# Altium PCB Mach_In.PcbDoc
Units mm, origin at the board's own origin, x right, y up, seen from the top; angles counter-clockwise.
Board outline 250 x 150 mm, 2 copper layers (Top Layer, Bottom Layer); 89 components, 76 nets, 360 pads, 0 vias.
Unrouted connection lines stored in the file: 224.
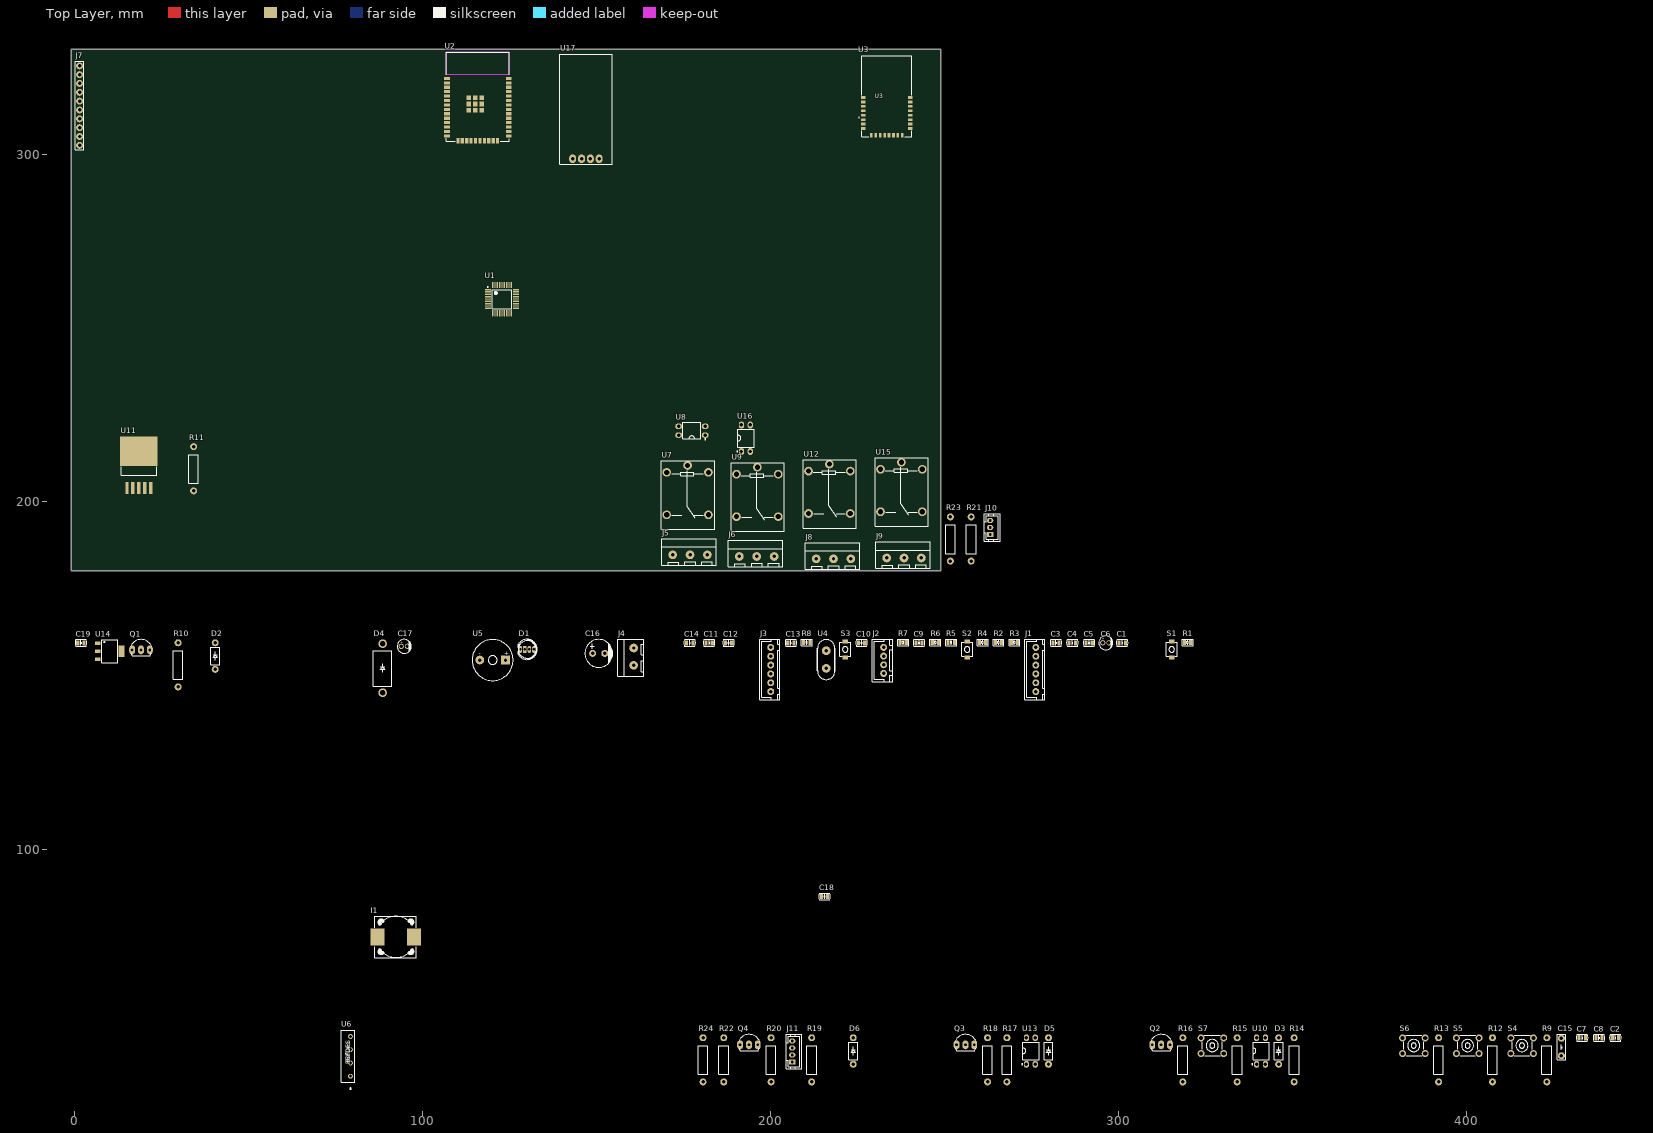
[diagram p0: Top Layer view]
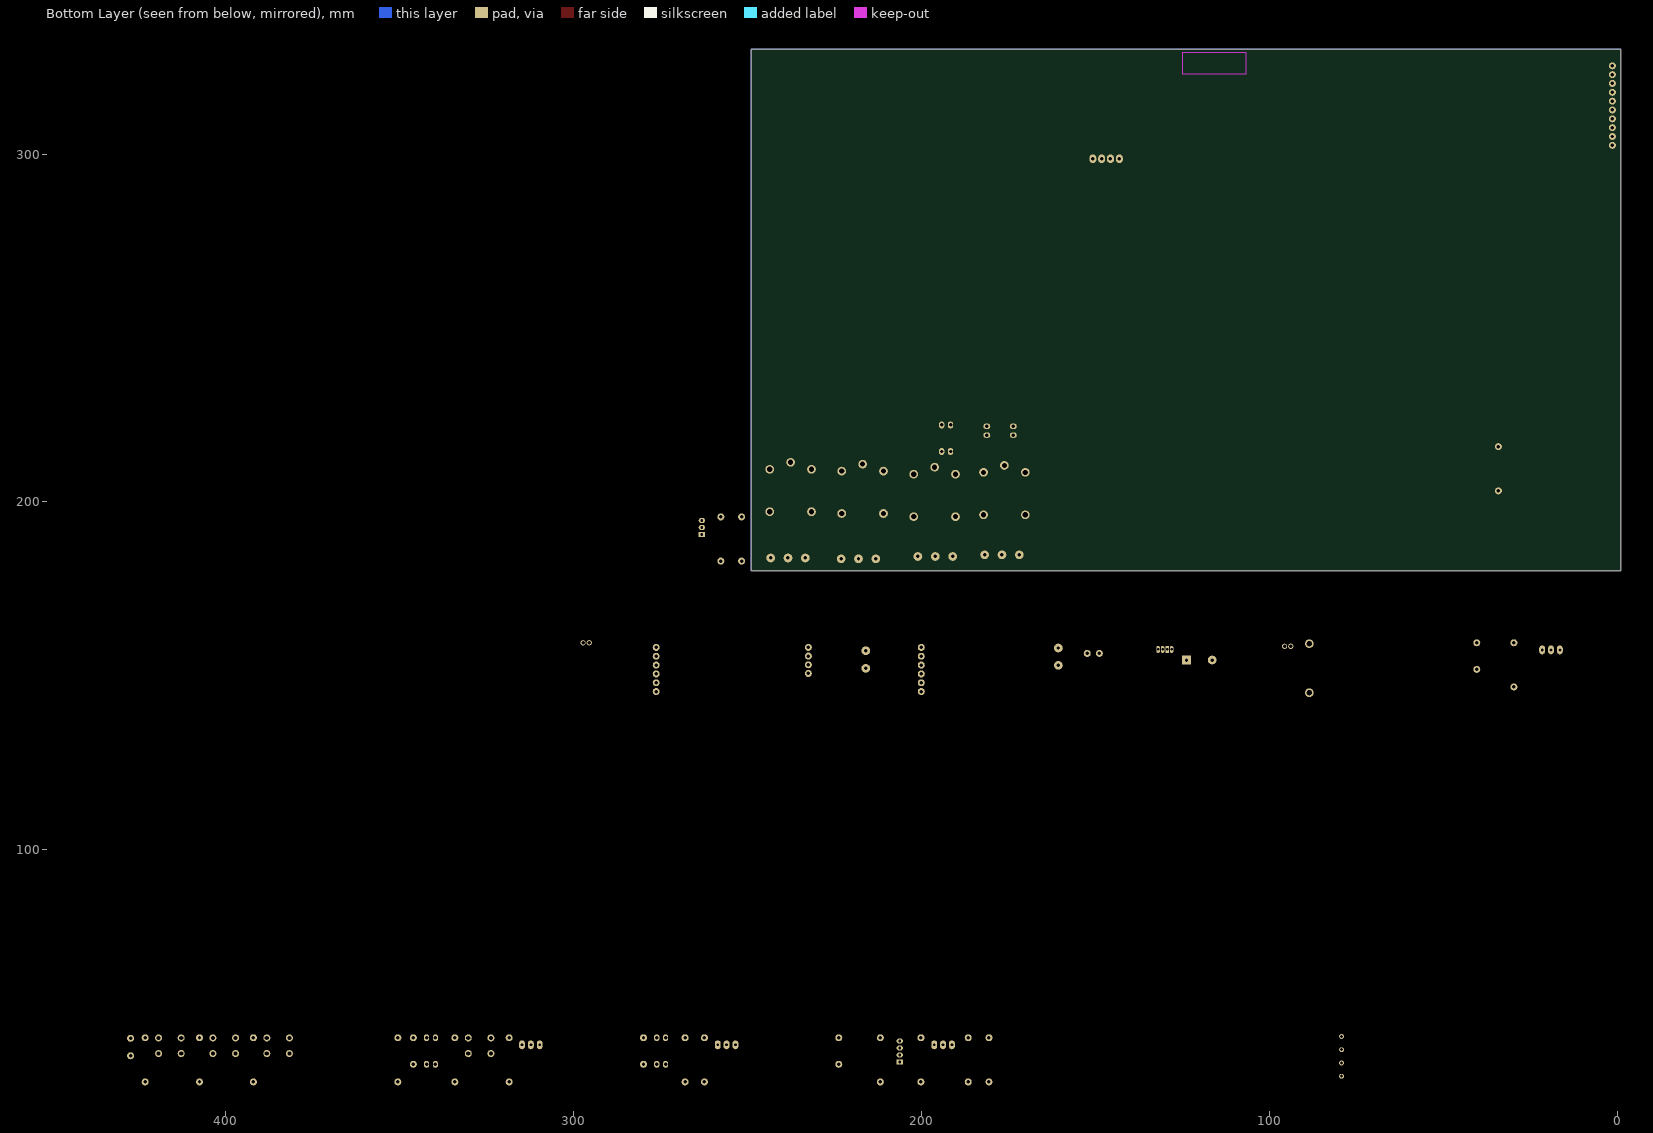
[diagram p1: Bottom Layer view, seen from below]

## Layer stack, top to bottom
Top Solder: solder mask 0.0102, Solder Resist, Dk 3.5
Top Layer: signal copper 0.0356
Dielectric 1: dielectric 0.32, FR-4, Dk 4.8
Bottom Layer: signal copper 0.0356
Bottom Solder: solder mask 0.0102, Solder Resist, Dk 3.5

## Board outline
-1.08,180.2 -1.08,330.2 248.92,330.2 248.92,180.2

## Design rules (kind name [scope] priority, off if disabled: settings)
Clearance [All] p1: gap=0.254 ignorepadtopadclearanceinfootprint=FALSE
PolygonConnect [All] p1: connectstyle=Relief reliefconductorwidth=0.254 reliefentries=4 polygonreliefangle="90 Angle" airgapwidth=0.254
RoutingVias [All] p1: holewidth=0.711 width=1.27 viastyle="Through Hole" minholewidth=0.711 minwidth=1.27 maxholewidth=0.711 maxwidth=1.27
SolderMaskExpansion [All] p1: expansion=0.102 istentingtop=FALSE
SupplyNets "Schematic Supply Nets_3" [InNet('+12')] p1: voltage=0.000
SupplyNets "Schematic Supply Nets_2" [InNet('+3.3')] p2: voltage=0.000
SupplyNets "Schematic Supply Nets_1" [InNet('+5')] p3: voltage=0.000
SupplyNets "Schematic Supply Nets" [InNet('GND')] p4: voltage=0.000
Width [All] p1: maxlimit=0.254 minlimit=0.254 preferedwidth=0.254
30 further rules are at their usual default settings.

## Components (designator, comment, footprint, x,y, rotation, side; value= is the part's Value field where it differs from the comment)
C1 "100nF" "CAPACITOR 0805" 301.104,159.512 r0 top
C2 "100nF" "CAPACITOR 0805" 442.849,45.974 r0 top
C3 "100nF" "CAPACITOR 0805" 282.054,159.512 r0 top
C4 "100nF" "CAPACITOR 0805" 286.753,159.512 r0 top
C5 "100nF" "CAPACITOR 0805" 291.579,159.512 r0 top
C6 "10uF" 0.47uF/50V 296.405,159.512 r0 top
C7 "100nF" "CAPACITOR 0805" 433.324,45.974 r0 top
C8 "10uF" "CAPACITOR 0805" 438.15,45.974 r0 top
C9 "100nF" "CAPACITOR 0805" 242.684,159.512 r0 top
C10 "CAPACITOR 0805" "CAPACITOR 0805" 226.174,159.512 r0 top
C11 "100nF" "CAPACITOR 0805" 182.359,159.512 r0 top
C12 "10uF" "CAPACITOR 0805" 187.947,159.512 r0 top
C13 "CAPACITOR 0805" "CAPACITOR 0805" 205.854,159.512 r0 top
C14 "CAPACITOR 0805" "CAPACITOR 0805" 176.771,159.512 r0 top
C15 "103" "CAPACITOR 103" 427.355,43.307 r0 top
C16 "100uF" 100uF/50V 150.609,156.464 r0 top
C17 "47uF" 0.22uF/50V 94.729,158.496 r0 top
C18 "100nF" "CAPACITOR 0805" 215.53,86.614 r0 top
C19 "100uF" "CAPACITOR 0805" 1.765,159.512 r0 top
D1 "LED_RGB" LED_RGB_5mm 130.035,157.607 r0 top
D2 "1N4007" 1N4007 40.373,155.702 r0 top
D3 "1N4007" 1N4007 346.075,42.164 r0 top
D4 "1N5822" DO201AD 88.506,152.146 r0 top
D5 "1N4007" 1N4007 279.908,42.164 r0 top
D6 "1N4007" 1N4007 223.774,42.164 r0 top
I1 "1260" 1260 92.245,74.93 r0 top
J1 "CC DEBUGGER" JST-2.54-6P 275.958,151.892 r0 top
J2 "ST LINK" JST-2.54-4P 232.143,154.432 r0 top
J3 "USB TTL" JST-2.54-6P 199.758,151.892 r0 top
J4 "12AC" BORNE-5.00-2P 159.88,155.194 r0 top
J5 "BORNE-5.00-3P" BORNE-5.00-3P 176.546,185.6 r270 top
J6 "BORNE-5.00-3P" BORNE-5.00-3P 195.707,185.145 r270 top
J7 "TFT 2.8 inh" MALE-2.54-10P 1.377,313.944 r0 top
J8 "BORNE-5.00-3P" BORNE-5.00-3P 217.789,184.457 r270 top
J9 "BORNE-5.00-3P" BORNE-5.00-3P 238.061,184.711 r270 top
J10 "ACS712" JST-2.00-3P 263.652,192.659 r90 top
J11 "MQ_2" JST-2.00-4P 206.756,42.037 r90 top
Q1 "C9014" QTO-92 19.037,157.48 r0 top
Q2 "C9014" QTO-92 312.293,43.942 r0 top
Q3 "C9014" QTO-92 256.032,43.942 r0 top
Q4 "C9014" QTO-92 193.802,43.942 r0 top
R1 "RESISTOR_0805" RESISTOR_0805 319.9,159.639 r0 top
R2 "RESISTOR_0805" RESISTOR_0805 265.544,159.639 r0 top
R3 "RESISTOR_0805" RESISTOR_0805 270.116,159.639 r0 top
R4 "RESISTOR_0805" RESISTOR_0805 260.972,159.639 r0 top
R5 "RESISTOR_0805" RESISTOR_0805 251.955,159.639 r0 top
R6 "RESISTOR_0805" RESISTOR_0805 247.383,159.639 r0 top
R7 "RESISTOR_0805" RESISTOR_0805 238.112,159.639 r0 top
R8 "RESISTOR_0805" RESISTOR_0805 210.426,159.639 r0 top
R9 "1K" RESSITOR_PTH_12.5mm 423.164,39.624 r90 top
R10 "1K" RESSITOR_PTH_12.5mm 29.705,153.162 r90 top
R11 "1K" RESSITOR_PTH_12.5mm 34.163,209.55 r90 top
R12 "1K" RESSITOR_PTH_12.5mm 407.543,39.624 r90 top
R13 "1K" RESSITOR_PTH_12.5mm 392.049,39.624 r90 top
R14 "1K" RESSITOR_PTH_12.5mm 350.52,39.624 r90 top
R15 "1K" RESSITOR_PTH_12.5mm 334.137,39.624 r90 top
R16 "1K" RESSITOR_PTH_12.5mm 318.516,39.624 r90 top
R17 "1K" RESSITOR_PTH_12.5mm 267.97,39.624 r90 top
R18 "1K" RESSITOR_PTH_12.5mm 262.382,39.624 r90 top
R19 "1K" RESSITOR_PTH_12.5mm 211.836,39.624 r90 top
R20 "1K" RESSITOR_PTH_12.5mm 200.152,39.624 r90 top
R21 "1K" RESSITOR_PTH_12.5mm 257.683,189.357 r90 top
R22 "1K" RESSITOR_PTH_12.5mm 186.563,39.624 r90 top
R23 "2K" RESSITOR_PTH_12.5mm 251.714,189.357 r90 top
R24 "2K" RESSITOR_PTH_12.5mm 180.594,39.624 r90 top
S1 "PUSH_BUTTON_SMD_3X4X2" PUSH_BUTTON_SMD_3X4X2 315.328,157.607 r90 top
S2 "PUSH_BUTTON_SMD_3X4X2" PUSH_BUTTON_SMD_3X4X2 256.527,157.607 r90 top
S3 "PUSH_BUTTON_SMD_3X4X2" PUSH_BUTTON_SMD_3X4X2 221.475,157.607 r90 top
S4 "PUSH_BUTTON_6X6" PUSH_BUTTON_6X6 416.052,43.688 r0 top
S5 "PUSH_BUTTON_6X6" PUSH_BUTTON_6X6 400.431,43.688 r0 top
S6 "PUSH_BUTTON_6X6" PUSH_BUTTON_6X6 384.937,43.688 r0 top
S7 "PUSH_BUTTON_6X6" PUSH_BUTTON_6X6 327.025,43.688 r0 top
U1 "STM32F103C8T6" STM-LQFP48_N 122.809,258.318 r0 top
U2 "ESP32-WROOM-32D" ESP32-WROOM-32D 115.841,312.804 r0 top
U3 "E18-MS1-PCB" E18-MS1-PCB_BYT 233.426,316.611 r0 top
U4 "CRISTAL_8Mhz" CRISTAL_16Mhz 216.014,154.686 r90 top
U5 "BUZZER" BUZZER_12mm 120.129,154.559 r0 top
U6 "KBP210G" TO_P2005G_DIO 79.248,34.925 r90 top
U7 "RELE" RELE 176.276,201.93 r270 top
U8 "PC817" PC817_DIP 177.419,220.472 r90 top
U9 "RELE" RELE 196.342,201.422 r270 top
U10 "PC817" PC817_DIP 340.995,42.164 r0 top
U11 "LM2596" LM2596 18.415,210.312 r270 top
U12 "RELE" RELE 217.043,202.311 r270 top
U13 "PC817" PC817_DIP 274.828,42.164 r0 top
U14 "AMS1117" AMS1117 10.02,157.099 r0 top
U15 "RELE" RELE 237.744,202.819 r270 top
U16 "PC817" PC817_DIP 192.913,218.313 r0 top
U17 "DHT22" DHT22_90 146.939,312.928 r270 top

## Footprints (in the part's own frame and the unit in brackets; to place one, negate y for a bottom-side part, rotate by r counter-clockwise, add the part's x,y. Pads: shape width x height; smd on the part's side, far side on the other; paste and mask are expansions set on the pad)
0.22uF/50V [mm] "ELECTROLYTIC CAPACITOR 4mm"
  round 1.5 hole 1: 1(0.889,0) 2(-0.889,0)
  silkscreen extent -2.01,-2 2.03,2, body extent -1.99,-1.99 2.01,1.99, height 7.01
0.47uF/50V [mm] "ELECTROLYTIC CAPACITOR 4mm"
  round 1.5 hole 1: 1(0.889,0) 2(-0.889,0)
  silkscreen extent -2.01,-2 2.03,2, body extent -1.99,-1.99 2.01,1.99, height 7.01
1N4007 [mm] "Rectifier Diode 1000V 1A DO-41"
  round 2 hole 1: 1(0,-3.81) 2(0,3.81)
  silkscreen extent -1.27,-2.54 1.27,2.54, body extent -1.35,-4.24 1.35,4.24, height 3.35
100uF/50V [mm] "ELECTROLYTIC CAPACITOR 8mm"
  round 2 hole 1 paste-2539.97 mask+0.1: 1(1.745,0) 2(-1.745,0)
  silkscreen extent -3.97,-4 4.03,4, body extent -3.97,-4 4.03,4, height 12
1260 [mm]
  rect 4x5 smd: 1(-5.25,0) 2(5.25,0)
  silkscreen extent -6.04,-6 5.96,6, body extent -6.07,-6.02 5.93,5.98, height 7.46
AMS1117 [mm] "SOT-223"
  rect 1.65x1 smd: 1(-3.4,2.29) 2(-3.4,0) 3(-3.4,-2.29)
  rect 1.65x3.3 smd: 2(3.4,0)
  silkscreen extent -2.3,-3.35 2.3,3.35, body extent -3.6,-3.25 3.4,3.25, height 1.87
BORNE-5.00-2P [mm]
  round 2.5 hole 1: 1(0.754,2.82) 2(0.754,-2.18)
  silkscreen extent -3.75,-5.27 3.75,5.27, body extent -3.86,-5.28 3.74,5.32, height 10.1
BORNE-5.00-3P [mm]
  round 2.5 hole 1: 1(0.815,5.318) 2(0.815,0.318) 3(0.815,-4.683)
  silkscreen extent -3.8,-7.81 3.8,7.81, body extent -3.8,-7.79 3.8,7.81, height 10.1
BUZZER_12mm [mm] "BUZZER MAGNETIC 12MM"
  rect 2.5x2.5 hole 1: 1(3.688,0)
  round 2.5 hole 1: 2(-3.688,0)
  silkscreen extent -5.9,-5.9 5.89,5.88, body extent -6,-5.98 5.99,6.02, height 9.51
"CAPACITOR 103" [mm]
  round 2 hole 1: 1(0,-2.516) 2(0,2.516)
  silkscreen extent -1.27,-3.71 1.27,3.71, body extent -1.2,-2.93 1.25,2.72, height 5.3
"CAPACITOR 0805" [mm]
  rect 0.9x1.45 smd: 1(-0.9,0) 2(0.9,0)
  silkscreen extent -1.68,-0.95 1.67,0.95, body extent -1.03,-0.62 0.97,0.63, height 0.61
CRISTAL_16Mhz [mm] "CRYSTAL 16MHZ PTH"
  round 2.5 hole 1: 1(-2.54,0) 2(2.54,0)
  silkscreen extent -5.75,-2.56 5.75,2.56, body extent -5.56,-2.24 5.44,2.26, height 3.55
DHT22_90 [mm]
  oval 2.5x2 hole 1: 1(14.287,-3.81) 2(14.287,-1.27) 3(14.287,1.27) 4(14.287,3.81)
  silkscreen extent -15.81,-7.49 15.81,7.49, body extent -15.81,-7.55 14.54,7.55, height 7.73
DO201AD [mm] "DO201AD"
  round 2.5 hole 1.4 slot 1.405 at 90 deg: 1(0,-6.985) 2(0,7.112)
  silkscreen extent -2.67,-5.06 2.67,5.1, body extent -2.64,-7.73 2.64,7.73, height 5.65
E18-MS1-PCB_BYT [mil]
  rect 51x30 smd paste+0 mask+0: 1(-264,-13.78) 2(-264,-63.78) 3(-264,-113.78) 4(-264,-163.78) 5(-264,-213.78) 6(-264,-263.78) 7(-264,-313.78) 8(-264,-363.78) 17(264,-363.78) 18(264,-313.78) 19(264,-263.78) 20(264,-213.78) 21(264,-163.78) 22(264,-113.78) 23(264,-63.78) 24(264,-13.78)
  rect 30x51 smd paste+0 mask+0: 9(-175,-439.5) 10(-125,-439.5) 11(-75,-439.5) 12(-25,-439.5) 13(25,-439.5) 14(75,-439.5) 15(125,-439.5) 16(175,-439.5)
  silkscreen extent -282,-458 282,458, body extent -280,-455 280,453, height 94
ESP32-WROOM-32D [mm] "Chip SMD 39 Pads 18x25.5mm w/ Antenna."
  rect 1.65x0.9 smd: 1(-8.875,8.943) 2(-8.875,7.673) 3(-8.875,6.403) 4(-8.875,5.133) 5(-8.875,3.863) 6(-8.875,2.593) 7(-8.875,1.323) 8(-8.875,0.053) 9(-8.875,-1.217) 10(-8.875,-2.487) 11(-8.875,-3.757) 12(-8.875,-5.027) 13(-8.875,-6.297) 14(-8.875,-7.567) 25(8.875,-7.567) 26(8.875,-6.297) 27(8.875,-5.027) 28(8.875,-3.757) 29(8.875,-2.487) 30(8.875,-1.217) 31(8.875,0.053) 32(8.875,1.323) 33(8.875,2.593) 34(8.875,3.863) 35(8.875,5.133) 36(8.875,6.403) 37(8.875,7.673) 38(8.875,8.943)
  rect 0.9x1.65 smd: 15(-5.72,-8.942) 16(-4.45,-8.942) 17(-3.18,-8.942) 18(-1.91,-8.942) 19(-0.64,-8.942) 20(0.63,-8.942) 21(1.9,-8.942) 22(3.17,-8.942) 23(4.44,-8.942) 24(5.71,-8.942)
  rect 1.33x1.33 smd: 39(-2.544,-0.244) 39(-2.544,1.591) 39(-2.544,3.426) 39(-0.709,-0.244) 39(-0.709,1.591) 39(-0.709,3.426) 39(1.126,-0.244) 39(1.126,1.591) 39(1.126,3.426)
  Keep-Out Layer region: -9,10.168 9,10.168 9,16.468 -9,16.468
  silkscreen extent -9,-9.07 9,16.54, body extent -9.03,-9.05 9.04,16.49, height 3
JST-2.00-3P [mm]
  rect 1.5x1.8 hole 0.8 paste-2539.97 mask+0.051: 1(-2,0.508)
  oval 1.5x1.8 hole 0.8 paste-2539.97 mask+0.051: 2(0,0.508) 3(2,0.508)
  silkscreen extent -3.97,-2.35 4.01,2.18, body extent -3.94,-2.31 3.96,2.19, height 6.1
JST-2.00-4P [mm]
  rect 1.5x1.8 hole 0.8 paste-2539.97 mask+0.102: 1(-3,0.508)
  oval 1.5x1.8 hole 0.8 paste-2539.97 mask+0.102: 2(-1,0.508) 3(1,0.508) 4(3,0.508)
  silkscreen extent -4.95,-2.21 4.95,2.23, body extent -4.95,-2.27 4.95,2.23, height 6.1
JST-2.54-4P [mm]
  round 2 hole 1: 1(0.385,3.76) 2(0.385,1.26) 3(0.385,-1.24) 4(0.385,-3.74)
  silkscreen extent -2.92,-6.1 2.92,6.1, body extent -2.92,-6.09 2.92,6.09, height 7.21
JST-2.54-6P [mm]
  round 2 hole 1: 1(0.298,6.293) 2(0.298,3.753) 3(0.298,1.213) 4(0.298,-1.327) 5(0.298,-3.867) 6(0.298,-6.407)
  silkscreen extent -2.92,-8.69 2.92,8.69, body extent -2.97,-8.73 2.87,8.64, height 7.23
LED_RGB_5mm [mm]
  oval 1x2 hole 0.7: 1(-1.95,0) 3(0.65,0) 4(1.95,0)
  rect 1x2 hole 0.7: 2(-0.65,0)
  silkscreen extent -2.51,-2.9 2.95,2.9, body extent -2.47,-2.96 2.97,2.94, height 8.95
LM2596 [mm] "TO-263-5"
  rect 3.4x1 smd paste-3 mask+0: 1(6.33,-3.4) 2(6.33,-1.7) 3(6.33,0) 4(6.33,1.7) 5(6.33,3.4)
  rect 8.6x10.7 smd paste-6 mask+0: 6(-4.27,0)
  silkscreen extent 0.25,-5.08 2.64,5.08, body extent -7.11,-5.08 7.24,5.08, height 4.65
MALE-2.54-10P [mm]
  round 2 hole 1: 1(0,11.43) 2(0,8.89) 3(0,6.35) 4(0,3.81) 5(0,1.27) 6(0,-1.27) 7(0,-3.81) 8(0,-6.35) 9(0,-8.89) 10(0,-11.43)
  silkscreen extent -1.25,-12.74 1.25,12.79, body extent -1.24,-12.74 1.16,12.66, height 8.36
PC817_DIP [mm] "DIP-4"
  oval 1.524x2 hole 1: 1(-1.27,-3.81) 2(1.27,-3.81) 3(1.27,3.81) 4(-1.27,3.81)
  silkscreen extent -2.63,-3.96 2.38,2.58, body extent -2.27,-3.93 2.31,3.95, height 4.16
PUSH_BUTTON_6X6 [mm]
  round 2 hole 1.2: 1(-3.25,-2.25) 1(3.25,-2.25) 2(-3.25,2.25) 2(3.25,2.25)
  silkscreen extent -2.9,-2.9 2.9,3, body extent -3.94,-3.07 4.07,2.93, height 6.8
PUSH_BUTTON_SMD_3X4X2 [mm]
  rect 1.23x1.5 smd: 1(-2.3,0) 2(2.3,0)
  silkscreen extent -2.03,-1.54 2.03,1.54, body extent -2.49,-1.45 2.51,1.45, height 2
QTO-92 [mil] "TO-92"
  oval 66x100 hole 32: 1(-100,0) 2(0,0) 3(100,0)
  silkscreen extent -117,-65 120,118, body extent -109,-66 109,95, height 245
RELE [mm]
  round 2.5 hole 1.5: 1(-6.565,5.88) 2(-6.565,-6.12) 3(-8.565,-0.12) 4(5.635,5.88) 5(5.635,-6.12)
  silkscreen extent -9.84,-7.62 9.84,7.62, body extent -9.74,-7.7 9.86,7.7, height 15.5
RESISTOR_0805 [mm]
  rect 0.9x1.45 smd: 1(-0.9,0) 2(0.9,0)
  silkscreen extent -1.56,-0.93 1.57,0.93, body extent -0.98,-0.64 1.02,0.61, height 0.46
RESSITOR_PTH_12.5mm [mm]
  round 2 hole 1: 1(-6.35,0) 2(6.35,0)
  silkscreen extent -4.19,-1.4 4.06,1.4, body extent -6.55,-1.51 6.55,1.5, height 3.2
STM-LQFP48_N [mm] "QFP, 48-Leads, Body 7x7mm, Pitch 0.5mm, IPC Medium Density"
  oval 1.8x0.3 smd: 1(-4.05,2.75) 2(-4.05,2.25) 3(-4.05,1.75) 4(-4.05,1.25) 5(-4.05,0.75) 6(-4.05,0.25) 7(-4.05,-0.25) 8(-4.05,-0.75) 9(-4.05,-1.25) 10(-4.05,-1.75) 11(-4.05,-2.25) 12(-4.05,-2.75) 25(4.05,-2.75) 26(4.05,-2.25) 27(4.05,-1.75) 28(4.05,-1.25) 29(4.05,-0.75) 30(4.05,-0.25) 31(4.05,0.25) 32(4.05,0.75) 33(4.05,1.25) 34(4.05,1.75) 35(4.05,2.25) 36(4.05,2.75)
  oval 0.3x1.8 smd: 13(-2.75,-4.05) 14(-2.25,-4.05) 15(-1.75,-4.05) 16(-1.25,-4.05) 17(-0.75,-4.05) 18(-0.25,-4.05) 19(0.25,-4.05) 20(0.75,-4.05) 21(1.25,-4.05) 22(1.75,-4.05) 23(2.25,-4.05) 24(2.75,-4.05) 37(2.75,4.05) 38(2.25,4.05) 39(1.75,4.05) 40(1.25,4.05) 41(0.75,4.05) 42(0.25,4.05) 43(-0.25,4.05) 44(-0.75,4.05) 45(-1.25,4.05) 46(-1.75,4.05) 47(-2.25,4.05) 48(-2.75,4.05)
  silkscreen extent -4.17,-2.75 2.75,3.57, body extent -3.5,-3.5 3.5,3.5, height 1.6
TO_P2005G_DIO [mil]
  round 54 / inner round 60 / far side round 54 hole 34 paste-99999 mask+0: 1(0,0) 2(150,0) 3(300,0) 4(450,0)
  silkscreen extent -148,-49 520,105, body extent -66,-44 516,100, height 808

## Part data
C1 C2 C3 C4 C5 C7 C8 C9 C11 C12 C18 C19: library part "CAPACITOR 0805", "Generic Capacitor 0805, 2x1.25x1.4mm."
C6: library part 0.47uF/50V, "Electrolytic Capacitor 0.47uF/50V"
C10 C13 C14: "Generic Capacitor 0805, 2x1.25x1.4mm."
C15: library part "CAPACITOR 103", "Ceramic Capacitor 103, 5mm."
C16: library part 100uF/50V, "Electrolytic Capacitor 100uF/50V"
C17: library part 0.22uF/50V, "Electrolytic Capacitor 0.22uF/50V"
D1: library part LED_RGB_5mm, "LED RGB 4 Pins 5mm Common Cathode.", JLCPCB PN=C2837021
D2 D3 D5 D6: "Rectifier Diode 1000V 1A DO-41", JLCPCB PN=C3033995, ComponentLink1Description=Datasheet, ComponentLink1URL=https://www.mouser.com/datasheet/2/849/1n4001-2577232.pdf, Digikey PN=4617-1N4007TB-ND, Mouser PN=637-1N4007
D4: "Diode Schottky 40V 3A DO201AD", JLCPCB PN=C3018526, Digikey PN=497-11370-1-ND, Mouser PN=511-1N5822
I1: "Generic Encapsulated Inductor 1260."
J1 J3: library part JST-2.54-6P, "Female Connector JST 6 Vias, 2.54mm."
J2: library part JST-2.54-4P, "Female Connector JST 4 Vias, 2.54mm."
J4: library part BORNE-5.00-2P, "Borne 2 Vias, Pitch 5mm.", JLCPCB PN=C91153
J5 J6 J8 J9: "Borne 3 Vias, Pitch 5mm.", JLCPCB PN=C91154
J7: library part MALE-2.54-10P, "Male Header Connector 2.54mm 10 Pins.", JLCPCB PN=C492409
J10: library part JST-2.00-3P, "Female Connector JST 3 Vias, 2.00mm.", JLCPCB PN=C5175231
J11: library part JST-2.00-4P, "Female Connector JST 4 Vias, 2.00mm.", JLCPCB PN=C5175232
Q1 Q2 Q3 Q4: library part NPN_EBC, "P 600mW, EBC"
R1 R2 R3 R4 R5 R6 R7 R8: "Generic Resistor 0805."
R9 R10 R11 R12 R13 R14 R15 R16 R17 R18 R19 R20 R21 R22 R23 R24: library part RESISTOR_12.5mm, "Generic Resistor 12.5mm."
S1 S2 S3: "Push Button Tactile Switch SMD 2 Pins 3x4x2mm.", JLCPCB PN=C231644
S4 S5 S6 S7: "Push Button Tactile Switch PTH 4 Pins 6x6mm.", JLCPCB PN=C255811
U1: "ARM Cortex-M3 32-bit MCU, 64 KB Flash, 20 KB Internal RAM, 37 I/Os, 48-pin LQFP, -40 to 85 degC, Tray", I/Os (High Current)=37, Operating Frequency(F) (Processor speed) (MHz)=72, Supplier Part Number 1=497-6063-ND, Supply Voltage(Vcc) min (V)=2, A/D Converter="2x12-bit (10 Channel)", ComponentLink1Description="Manufacturer URL", ComponentLink1URL=http://www.st.com/web/en/home.html, ComponentLink2Description=Datasheet, ComponentLink2URL=http://www.st.com/st-web-ui/static/active/en/resource/technical/document/datasheet/CD00161566.pdf, ComponentLink3Description="Package Specification", ComponentLink3URL=http://www.st.com/st-web-ui/static/active/en/resource/technical/document/datasheet/DM00058181.pdf, Core="ARM Cortex-M3", DatasheetVersion="Rev. 16", FLASH Size (Prog) (kB)=64, Internal RAM Size (kB)=20, Mounting Technology="Surface Mount", PackageDescription="48-Pin Low Profile Quad Flat Package, 7 x 7 mm Body, 0.5 mm Pitch", PackageReference=LQFP48, PackageVersion="Rev. 6, 06/2013", Packing=Tray, PartNumber=STM32F103C8T6, Supplier 1=Digi-Key, Supplier 2=Farnell, Supplier 3=Newark, Supplier 4=Newark, Supplier 5=Mouser, Supplier Part Number 2=1447637, Supplier Part Number 3=59M2182, Supplier Part Number 4=57P1222, Supplier Part Number 5=511-STM32F103C8T6
U2: "Chip SMD 39 Pads Wifi 2.4GHz BLE 4.2 18x25.5mm w/ Antenna.", JLCPCB PN=C82899, ComponentLink1Description=Datasheet, ComponentLink1URL=https://www.mouser.com/datasheet/2/891/esp32_wroom_32d_esp32_wroom_32u_datasheet_en-1365844.pdf, Digikey PN=1965-ESP32-WROOM-32D-N8CT-ND, Mouser PN=ESP32-WROOM-32D-N4
U3: "No Description Available", Manufacturer_Name="Chengdu Ebyte Elec Tech", Copyright="Copyright (C) 2026 Ultra Librarian. All rights reserved.", Manufacturer_Part_Number=E18-MS1-PCB, RefDes=RefDes, Type=Type
U4: library part CRISTAL_16Mhz, "CRYSTAL 16MHZ, PTH and SMD", Digikey PN=3155-16M20P2/49US-ND, Mouser PN=449-LFXTAL022786BULK
U5: library part BUZZER_12mm, "BUZZER MAGNETIC 12MM", JLCPCB PN=C781866, Digikey PN=433-WT-1209T-ND, Mouser PN=433-WT-1209T-ND
U6: "Description", Manufacturer_Name="Diodes Inc", Copyright="Copyright (C) 2025 Ultra Librarian. All rights reserved.", Manufacturer_Part_Number=KBP210G, RefDes=RefDes, Type=Type
U7 U9 U12 U15: "Generic Rele PTH 5 Pins."
U8 U10 U13 U16: "Optocouplers Phototransistor 4 Pins, DIP and SMD.", JLCPCB PN DIP=C3008368, JLCPCB PN SMD=C3025164, ComponentLink1Description=Datasheet, ComponentLink1URL=https://www.farnell.com/datasheets/73758.pdf
U11: "IC BUCK STEP DOWN 3A TO-263-6", JLCPCB PN=C2980822, ComponentLink1Description=Datasheet, ComponentLink1URL=https://www.ti.com/lit/ds/symlink/lm2596.pdf, Digikey PN=4518-LM2596S-ADJCT-ND, Mouser PN=863-LM2596DSADJG
U14: "IC REG LINEAR 1A SOT-89-3L", JLCPCB PN=C963410, ComponentLink1Description=Datasheet, ComponentLink1URL=http://www.advanced-monolithic.com/pdf/ds1117.pdf, Digikey PN=4518-AMS1117-3.3CT-ND
U17: "SENSOR HUMIDITY/TEMPERATURE", Digikey PN=1528-1228-ND

## Nets (pads, with @x,y where several pads share a name; then routed paths per layer and width w, separated by ;. In a path a pad name is that pad's centre, name@x,y a point inside that pad or via, vN(x,y) a via of type N, cw(c..) or ccw(c..) an arc to the next point about the centre after c; other vN are vias at no path point)
+3.3: C2.2 C3.2 C4.2 C5.2 C6.2 C7.2 C8.2 C11.2 C12.2 C19.2 J1.5 J2.4 J3.5 J7.1 J7.8 R1.2 R3.1 R4.2 R6.2 R7.2 R9.2 R12.2 R13.2 R14.2 U1.9 U1.24 U1.36 U1.48 U2.2 U3.2 U14.2 U17.1
+5: C17.2 C18.2 D2.2 D3.2 D5.2 D6.2 I1.2 J10.1 J11.1 U7.1 U8.4 U9.1 U10.4 U11.4 U12.1 U13.4 U14.3 U15.1 U16.4
+12: C15.2 C16.2 U6.4 U11.1
Aout: R22.1 R24.2 U1.10
BOOT: R5.2 U1.44
BUTTON_1: R9.1 S4.1 U1.18
BUTTON_2: R12.1 S5.1 U1.19
BUTTON_3: R13.1 S6.1 U1.20
BUZZER: U1.25 U5.1
CS: J7.3 U1.14
DATA_DHT: U1.22 U17.2
DC: J1.3 U3.3
DC_TFT: J7.5 U1.16
DD: J1.2 U3.4
DTR: J3.1 R3.2 U2.25
GND: C1.1 C2.1 C3.1 C4.1 C5.1 C6.1 C7.1 C8.1 C9.1 C10.2 C11.1 C12.1 C13.1 C14.2 C15.1 C16.1 C17.1 C18.1 C19.1 D1.2 D4.1 J1.4 J2.2 J3.4 J7.2 J10.3 J11.2 Q1.1 Q2.1 Q3.1 Q4.1 R2.2 R5.1 R23.1 R24.1 S1.1 S2.1 S3.1 S4.2 S5.2 S6.2 S7.2 U1.8 U1.23 U1.35 U1.47 U2.1 U2.15 U2.38 U2.39 U3.1 U5.2 U6.3 U8.2 U10.2 U11.3 U11.5 U11.6 U13.2 U14.1 U16.2 U17.4
LED_BLUE: D1.4 U1.21
LED_GREEN: D1.3 U1.46
LED_RED: D1.1 U1.45
NetD2_1: D2.1 Q1.3 U7.2
NetD3_1: D3.1 Q2.3 U9.2
NetD4_2: D4.2 I1.1 U11.2
NetD5_1: D5.1 Q3.3 U12.2
NetD6_1: D6.1 Q4.3 U15.2
NetJ4_1: J4.1 U6.2
NetJ4_2: J4.2 U6.1
NetJ5_1: J5.1 U7.4
NetJ5_2: J5.2 U7.3
NetJ5_3: J5.3 U7.5
NetJ6_1: J6.1 U9.4
NetJ6_2: J6.2 U9.3
NetJ6_3: J6.3 U9.5
NetJ8_1: J8.1 U12.4
NetJ8_2: J8.2 U12.3
NetJ8_3: J8.3 U12.5
NetJ9_1: J9.1 U15.4
NetJ9_2: J9.2 U15.3
NetJ9_3: J9.3 U15.5
NetJ10_2: J10.2 R21.2
NetJ11_4: J11.4 R22.2
NetQ1_2: Q1.2 R11.1
NetQ2_2: Q2.2 R16.1
NetQ3_2: Q3.2 R18.1
NetQ4_2: Q4.2 R20.1
NetR2_1: R2.1 U2.14
NetR6_1: R6.1 U2.23
NetR10_1: R10.1 U8.1
NetR11_2: R11.2 U8.3
NetR15_1: R15.1 U10.1
NetR16_2: R16.2 U10.3
NetR17_1: R17.1 U13.1
NetR18_2: R18.2 U13.3
NetR19_1: R19.1 U16.1
NetR20_2: R20.2 U16.3
OSC_IN: C10.1 R8.1 U1.5 U4.2
OSC_OUT: C14.1 R8.2 U1.6 U4.1
OUT_ACS712: R21.1 R23.2 U1.11
RESET_SYSTEM: R14.1 S7.1
RESET_TFT: J7.4 U1.29
Role_1: R10.2 U1.39
Role_2: R15.2 U1.40
Role_3: R17.2 U1.41
Role_4: R19.2 U1.42
RS_ESP32: C9.2 R4.1 S2.2 U2.3
RS_STM: C13.2 R7.1 S3.2 U1.7
RS_ZB: C1.2 J1.1 R1.1 S1.2 U3.24
RXD: J3.2 U2.34
SCK: J7.7 U1.15
SDI(MOSI): J7.6 U1.17
SWCLK: J2.3 U1.37
SWDIO: J2.1 U1.34
TXD: J3.3 U2.35
UART1_STM_RX: U1.31 U2.31
UART1_STM_TX: U1.30 U2.30
UART2_STM_RX: U1.13 U3.20
UART2_STM_TX: U1.12 U3.21
pads on no net: J1.6 J3.6 J7.9 J7.10 J11.3 U1.1 U1.2 U1.3 U1.4 U1.26 U1.27 U1.28 U1.32 U1.33 U1.38 U1.43 U2.4 U2.5 U2.6 U2.7 U2.8 U2.9 U2.10 U2.11 U2.12 U2.13 U2.16 U2.17 U2.18 U2.19 U2.20 U2.21 U2.22 U2.24 U2.26 U2.27 U2.28 U2.29 U2.32 U2.33 U2.36 U2.37 U3.5 U3.6 U3.7 U3.8 U3.9 U3.10 U3.11 U3.12 U3.13 U3.14 U3.15 U3.16 U3.17 U3.18 U3.19 U3.22 U3.23 U17.3
copper on no net: | length 800
  Bottom Layer w0.254: -1.08,180.2 248.92,180.2 248.92,330.2 -1.08,330.2 -1.08,180.2

## Text inside footprints (layer, text, board x,y; h text height)
C6: Top Overlay "+" at 295.389,160.445 h0.5
C17: Top Overlay "+" at 93.713,159.429 h0.5
U3: Top Overlay "*" at 225.044,309.626 h1.27; Mechanical 13 "*" at 227.686,315.626 h1.27
U5: Top Overlay "+" at 123.452,155.889 h1.27; Top Overlay "-" at 116.086,155.719 h1.27
U6: Top Overlay "RefDes" at 79.162,38.735 h1.27 r90; Top Overlay "REFDES" at 79.162,38.417 h1.27 r90; Mechanical 13 "TAB" at 77.016,40.164 h0.64 r90; Mechanical 13 "RefDes2" at 79.162,38.417 h1.27 r90